# Altium PCB LedBlinker.PcbDoc
Units mil, origin at the board's own origin, x right, y up, seen from the top; angles counter-clockwise.
Board outline 1851.5 x 1851.5 mil, 2 copper layers (Top Layer, Bottom Layer), stack 64.8 mil thick; 36 components, 35 nets, 124 pads, 30 vias.
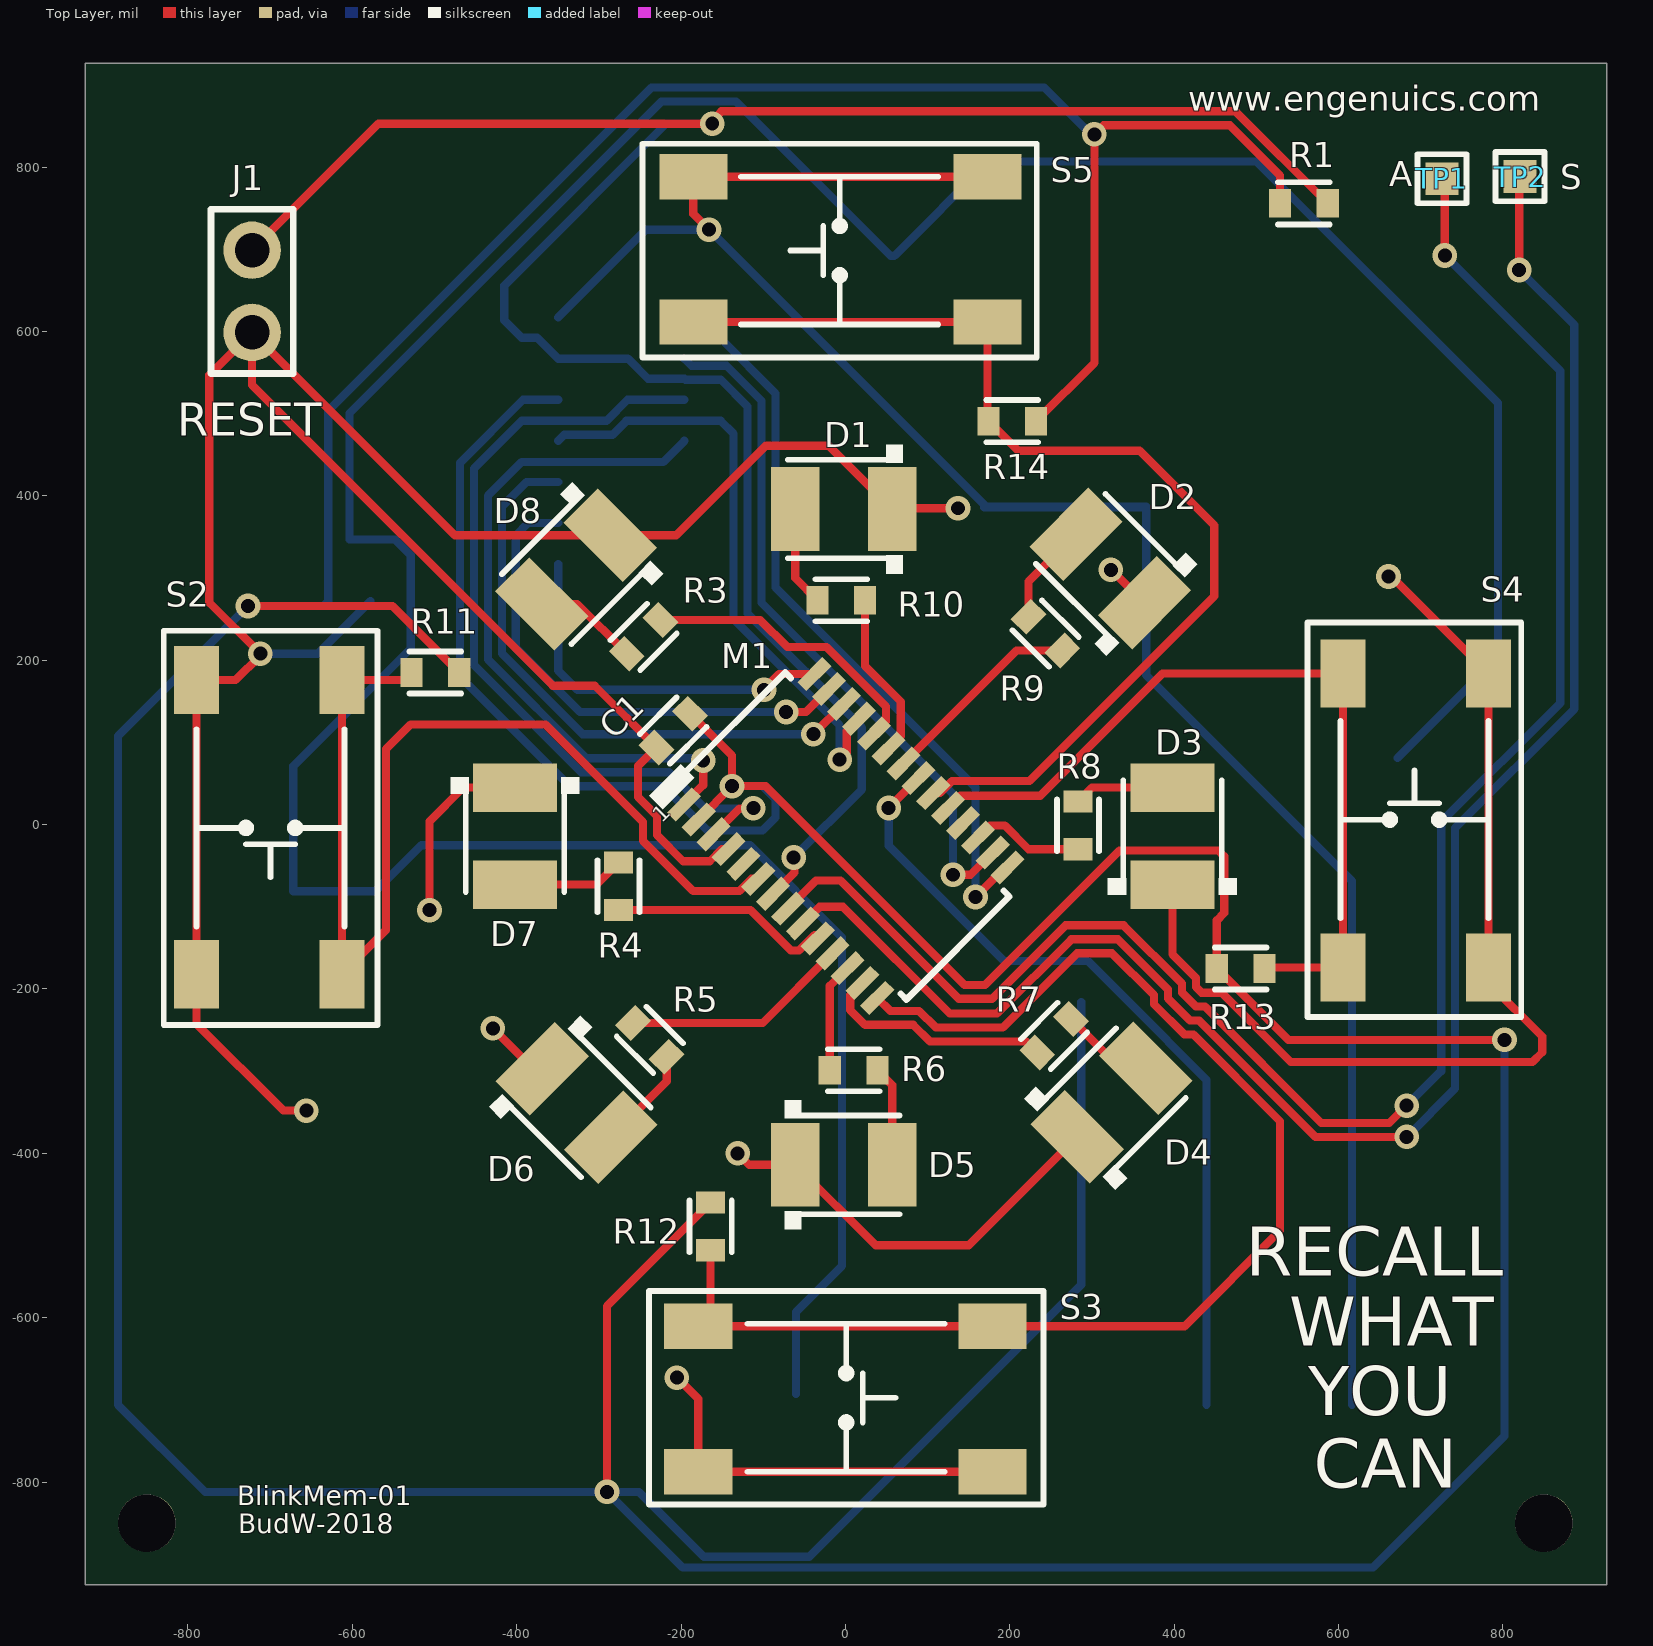
[diagram p0: Top Layer view]
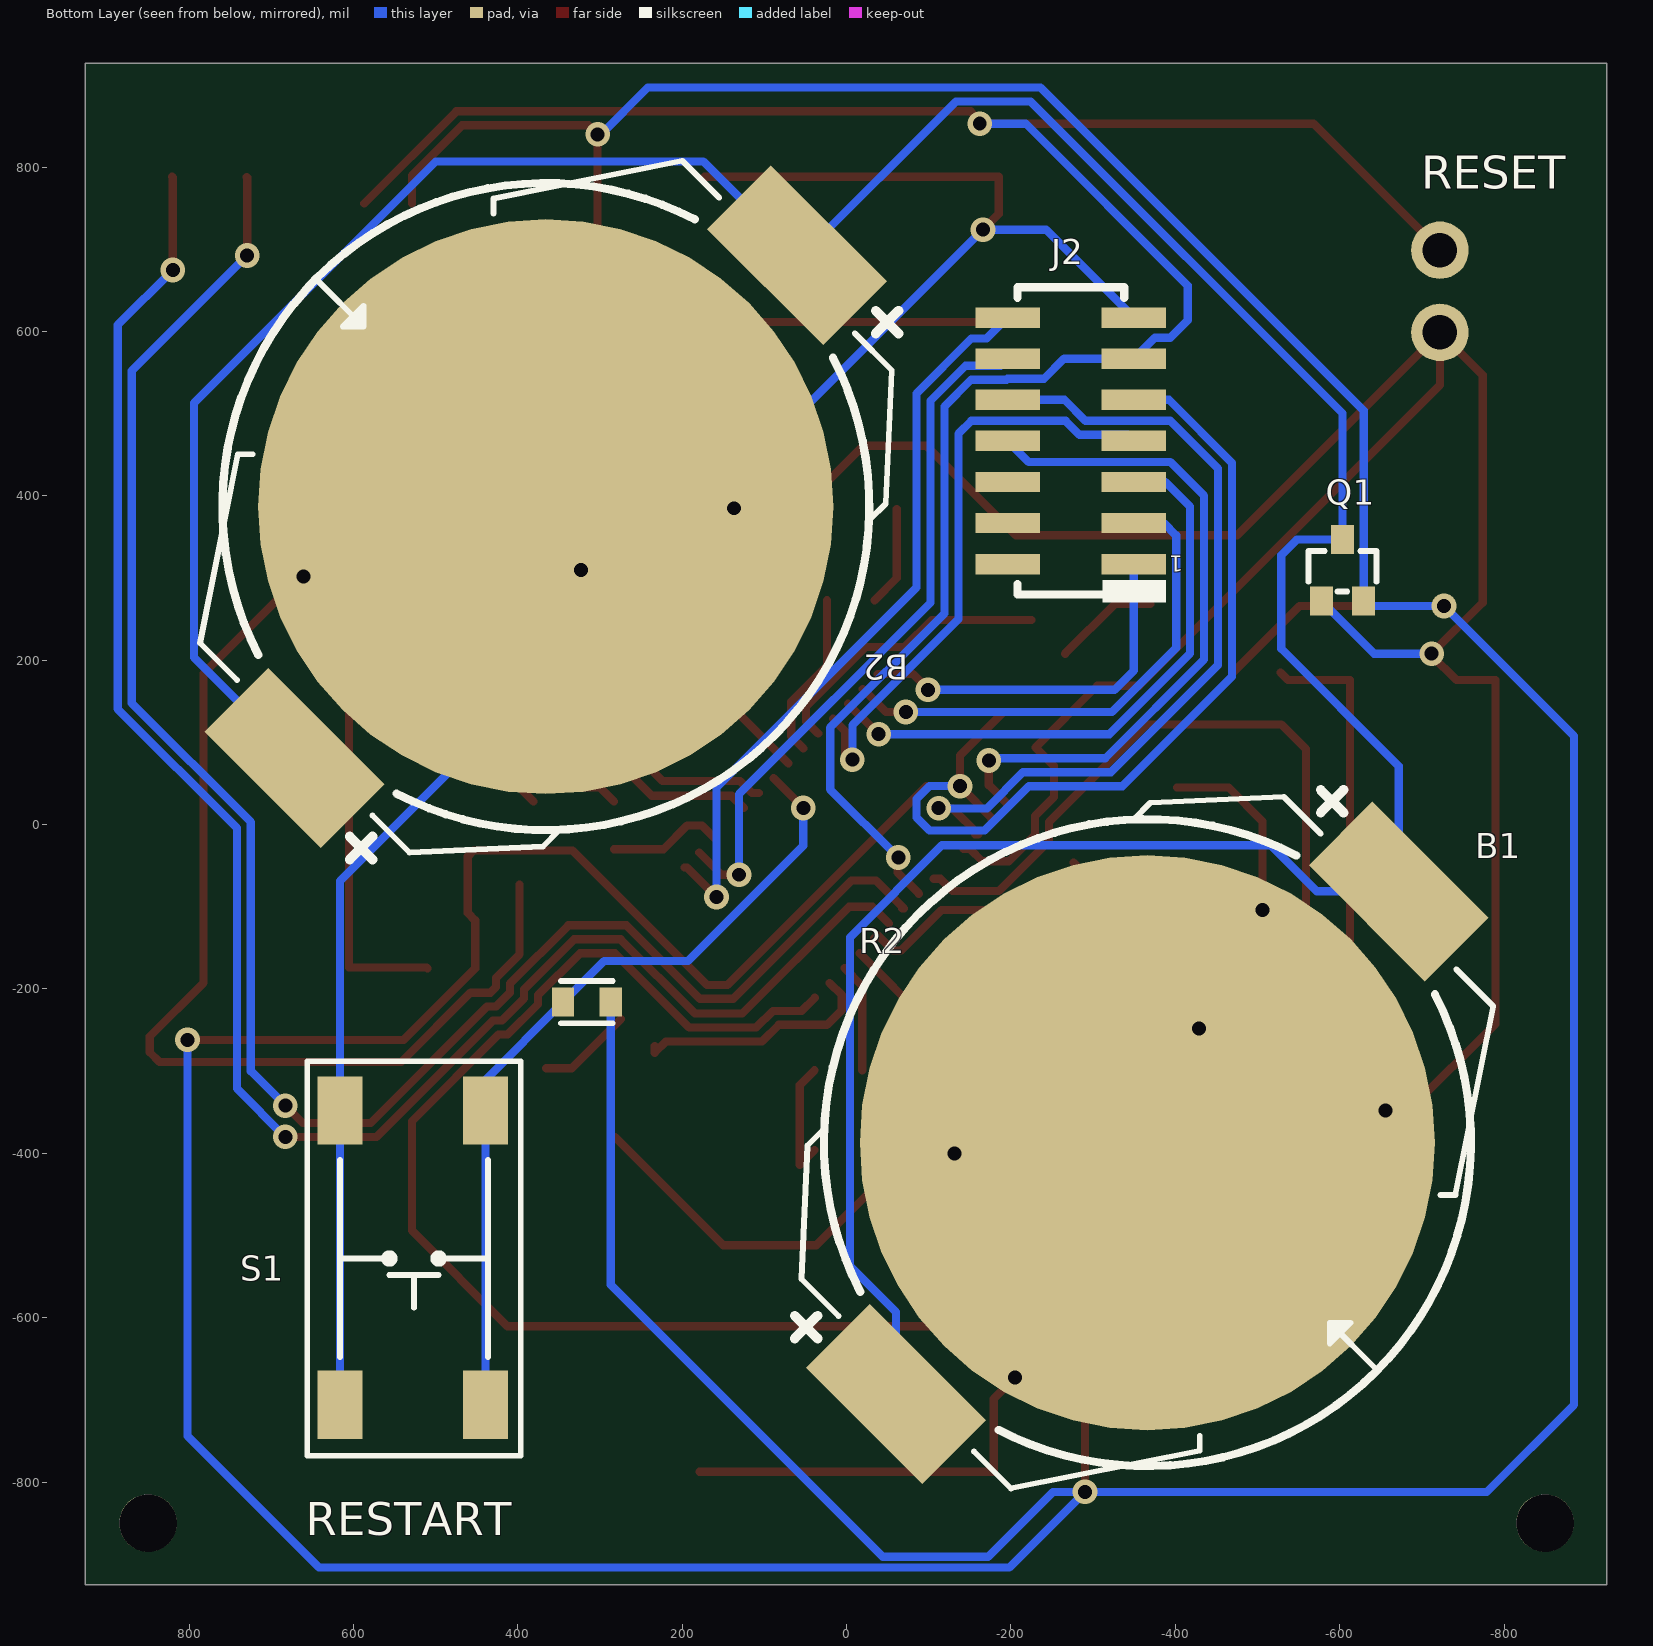
[diagram p1: Bottom Layer view, seen from below]

## Layer stack, top to bottom
Top Solder: solder mask 0.4, Solder Resist, Dk 3.5
Top Layer: signal copper 1.4
Dielectric1: core 62, FR-4, Dk 4.8
Bottom Layer: signal copper 1.4
Bottom Solder: solder mask 0.4, Solder Resist, Dk 3.5

## Board outline
-925,-925 -925,926.5 926.5,926.5 926.5,-925

## Design rules (kind name [scope] priority, off if disabled: settings)
Clearance ClearancePolygon [All vs InPoly] p1: gap=20 ignorepadtopadclearanceinfootprint=FALSE except(0: Arc-Hole Track-Hole SMDPad-Hole THPad-Hole Via-Hole Fill-Hole Poly-Hole Region-Hole Text-Hole)
Clearance [All] p2: gap=7 ignorepadtopadclearanceinfootprint=FALSE except(0: Arc-Hole Track-Hole SMDPad-Hole THPad-Hole Via-Hole Fill-Hole Poly-Hole Region-Hole Text-Hole)
HoleSize [All] p1: absolutevalues=TRUE maxlimit=250 minlimit=17 maxpercent=80.000 minpercent=20.000
MinimumSolderMaskSliver [All] p1 off: minsoldermaskwidth=10
PolygonConnect PolygonConnectVia [All vs IsVia] p1: connectstyle=Direct reliefconductorwidth=10 reliefentries=4 polygonreliefangle="90 Angle" airgapwidth=10
PolygonConnect [All] p2: connectstyle=Relief reliefconductorwidth=10 reliefentries=4 polygonreliefangle="90 Angle" airgapwidth=10
RoutingVias [All] p1: holewidth=17 width=26 viastyle="Through Hole" minholewidth=17 minwidth=26 maxholewidth=200 maxwidth=250
SilkToSilkClearance [All] p1 off: silktosilkclearance=10
SilkToSolderMaskClearance SilkscreenOverComponentPads [IsPad] p1 off: minsilkscreentomaskgap=7 clearancetoexposedcopper=TRUE
SolderMaskExpansion [All] p1: expansion=0
Width [All] p1: maxlimit=250 minlimit=7 preferedwidth=10
26 further rules are at their usual default settings.

## Components (designator, comment, footprint, x,y, rotation, side; value= is the part's Value field where it differs from the comment)
B1 "CR2032" "CONN BATTERY HOLDER CR2032" -366,-387 r135 bottom locked
B2 "CR2032" "CONN BATTERY HOLDER CR2032" 366,387 r315 bottom locked
C1 "1uF" 0603 -209.49,114.51 r225 top
D1 "CYN" "PLCC-2 AK" -2,384 r90 top locked
D2 "GRN" "PLCC-2 AK" 322.28,311.72 r45 top locked
D3 "YLW" "PLCC-2 AK" 398,-14 r0 top locked
D4 "ORG" "PLCC-2 AK" 323.72,-338.28 r315 top locked
D5 "RED" "PLCC-2 AK" -2,-414 r270 top locked
D6 "PNK" "PLCC-2 AK" -327.28,-338.72 r225 top locked
D7 "PRPL" "PLCC-2 AK" -402,-14 r180 top locked
D8 "BLU" "PLCC-2 AK" -327.72,310.28 r135 top locked
J1 "RESET PADS" HDR1X2 -722,649 r90 top
J2 "JTAG/SERIAL" "CONN 14POS 7X2 SMT FEMALE SMALL" -272.77,467 r0 bottom
M1 "MSP430F2122" TSSOP28 0.48,-13.8 r315 top locked
Q1 "DMG1013" SC-70-3 -603.41,309.4 r0 bottom
R1 "100k" 0603 558,756 r0 top
R2 "100k" 0603 316,-216 r180 bottom
R3 "390R" 0603 -245.51,228.49 r225 top
R4 "390R" 0603 -276,-75 r90 top
R5 "390R" 0603 -238,-262 r315 top
R6 "390R" 0603 10,-299 r0 top
R7 "390R" 0603 254,-257 r45 top
R8 "390R" 0603 283,-1 r90 top
R9 "390R" 0603 243.51,232.49 r135 top
R10 "390R" 0603 -5,273 r180 top
R11 "100k" 0603 -499,185 r0 top
R12 "100k" 0603 -164,-489 r90 top
R13 "100k" 0603 481,-175 r180 top
R14 "100k" 0603 203,491 r0 top
S1 "TL3301" "SWITCH TACT SMT TL3301" 528,-527 r270 bottom locked
S2 "TL3301" "SWITCH TACT SMT TL3301" -701,-3 r270 top locked
S3 "TL3301" "SWITCH TACT SMT TL3301" 0,-699 r0 top locked
S4 "TL3301" "SWITCH TACT SMT TL3301" 694,5 r90 top locked
S5 "TL3301" "SWITCH TACT SMT TL3301" -6,700 r180 top locked
TP1 "A" "TEST POINT SMT" 726,786 r0 top
TP2 "S" "TEST POINT SMT" 821,788.5 r90 top

## Footprints (in the part's own frame and the unit in brackets; to place one, negate y for a bottom-side part, rotate by r counter-clockwise, add the part's x,y. Pads: shape width x height; smd on the part's side, far side on the other; paste and mask are expansions set on the pad)
0603 [mil]
  rect 27x35 smd: 1(-29,0) 2(29,0)
  silkscreen extent -31,-26 31,26
"CONN 14POS 7X2 SMT FEMALE SMALL" [mm] "JTAG/SERIAL Connector Footprint"
  rect 2x0.63 smd: 1(-1.95,3.81) 2(1.95,3.81) 3(-1.95,2.54) 4(1.95,2.54) 5(-1.95,1.27) 6(1.95,1.27) 7(-1.95,0) 8(1.95,0) 9(-1.95,-1.27) 10(1.95,-1.27) 11(-1.95,-2.54) 12(1.95,-2.54) 13(-1.95,-3.81) 14(1.95,-3.81)
  silkscreen extent -2.95,-4.74 1.65,5
"CONN BATTERY HOLDER CR2032" [mm]
  rect 2.79x5.08 smd: +(-10.985,0) +(10.985,0)
  round 17.78 smd: -(0,0)
  silkscreen extent -11.99,-10 12,10
HDR1X2 [mil]
  round 70 hole 42: 1(-50,0) 2(50,0)
  silkscreen extent -100,-50 100,50
"PLCC-2 AK" [mil]
  rect 102x59 smd: A(0,59) K(0,-59)
  silkscreen extent -79,-72 79,68
SC-70-3 [mm]
  rect 0.7x0.9 smd paste+0 mask+0: 1(0.65,0.95) 2(-0.65,0.95) 3(0,-0.95)
  silkscreen extent -1.05,-0.6 1.05,0.65
"SWITCH TACT SMT TL3301" [mil]
  rect 83x55 smd: 1(-179,-88.5) 2(179,-88.5) 3(-179,88.5) 4(179,88.5)
  silkscreen extent -239,-129 241,132
"TEST POINT SMT" [mil]
  rect 40x40 smd paste-3937.01: 1(0,0)
  silkscreen extent -30,-30 30,30
TSSOP28 [mm]
  rect 0.4x1.1 smd: 1(-4.225,-2.85) 2(-3.575,-2.85) 3(-2.925,-2.85) 4(-2.275,-2.85) 5(-1.625,-2.85) 6(-0.975,-2.85) 7(-0.325,-2.85) 8(0.325,-2.85) 9(0.975,-2.85) 10(1.625,-2.85) 11(2.275,-2.85) 12(2.925,-2.85) 13(3.575,-2.85) 14(4.225,-2.85) 15(4.225,2.85) 16(3.575,2.85) 17(2.925,2.85) 18(2.275,2.85) 19(1.625,2.85) 20(0.975,2.85) 21(0.325,2.85) 22(-0.325,2.85) 23(-0.975,2.85) 24(-1.625,2.85) 25(-2.275,2.85) 26(-2.925,2.85) 27(-3.575,2.85) 28(-4.225,2.85) 28(-4.225,2.85)
  silkscreen extent -5.18,-3.43 4.9,2.25

## Part data
B1 B2: library part "CONN BATTERY HOLDER CR2032", "3V Coincell Battery", 2. Manufacturer=FCI, 3. Manufacturer Part Number=BK-912, 4. Digi-Key Part Number=BK-912-ND, 5. Internal Part Number=100192, 1. Description="CONN HOLDER COIN CELL 20MM SMD", 6. Last Modified=2012-09-03, 7. Modified By=JRL
C1: library part "CAPACITOR NON-POLARIZED", 1. Description="CAP [TYPE] [VALUE] [TOLERANCE] [VOLTAGE] [CLASS] [PACKAGE]"
D1: library part "LED AK", "CYAN", 1. Description="LED [COLOR] [STYLE] [PACKAGE] [MOUNT]"
D2: library part "LED AK", "GREEN", 1. Description="LED [COLOR] [STYLE] [PACKAGE] [MOUNT]"
D3: library part "LED AK", "YELLOW", 1. Description="LED [COLOR] [STYLE] [PACKAGE] [MOUNT]"
D4: library part "LED AK", "ORANGE", 1. Description="LED [COLOR] [STYLE] [PACKAGE] [MOUNT]"
D5: library part "LED AK", 1. Description="LED [COLOR] [STYLE] [PACKAGE] [MOUNT]"
D6: library part "LED AK", "PINK", 1. Description="LED [COLOR] [STYLE] [PACKAGE] [MOUNT]"
D7: library part "LED AK", "PURPLE", 1. Description="LED [COLOR] [STYLE] [PACKAGE] [MOUNT]"
D8: library part "LED AK", "BLUE", 1. Description="LED [COLOR] [STYLE] [PACKAGE] [MOUNT]"
J1: library part "CONN SIP 2"
J2: library part "CONN JTAG/SERIAL FEMALE", 2. Manufacturer=FCI, 3. Manufacturer Part Number=20021321-00014T4LF, 4. Digi-Key Part Number=609-3771-ND, 5. Internal Part Number=100254, 1. Description="CONN TERMINAL 14POS 7X12 1.27MM VERT SMD", 6. Last Modified=2018-10-07, 7. Modified By=BJW
M1: library part "MCU MSP430F2122 TSSOP28", 2. Manufacturer=TI, 3. Manufacturer Part Number=MSP430F2122TPWR, 4. Digi-Key Part Number=296-23365-ND, 1. Description="MCU MSP430F2122 TSSOP28 LED BLINKER", 6. Last Modified=2018-10-07, 7. Modified By=BJW
Q1: library part "TRANS PMOS 1G 2S 3D"
R1 R2 R3 R4 R5 R6 R7 R8 R9 R10 R11 R12 R13 R14: library part RESISTOR, 1. Description="RES [VALUE] [POWER] [TOLERANCE] [PACKAGE] [CONSTRUCTION]"
S1 S2 S3 S4 S5: library part "SWITCH SPST TL3301 JLEAD", "SPST TACT SWITCH", 2. Manufacturer=E-Switch, 3. Manufacturer Part Number=TL3301xxx, 1. Description="SWITCH TACT 260GF H=5.0MM SMT", 6. Last Modified=2014-10-24, 7. Modified By=JRL
TP1 TP2: library part "TEST POINT SMT", 2. Manufacturer=N/A, 1. Description="Test pad", 3. Manufacturer Part Number=N/A, 4. Digi-Key Part Number=N/A, 5. Internal Part Number=N/A, 6. Last Modified="June 12, 2008", 7. Modified By=JRL

## Free pads (board coordinates)
  round 70 hole 70 unplated paste-100 mask-100: ""(-850,-850) ""(850,-850)

## Via types
v1: diameter 30, hole 17, Top Layer to Bottom Layer, 30 vias

## Nets (pads, with @x,y where several pads share a name; then routed paths per layer and width w, separated by ;. In a path a pad name is that pad's centre, name@x,y a point inside that pad or via, vN(x,y) a via of type N, cw(c..) or ccw(c..) an arc to the next point about the centre after c; other vN are vias at no path point)
"BTN 1": M1.6 R11.1 S2.3 S2.4 | length 1311.4
  Top Layer w10: R11.1 -537,176 S2.3 S2.4 -559,-128.5 -559,92 -529,122 -365,122 -246.36,3.36 -246.36,-19.69 -185.26,-80.78 -128.87,-80.78 -114.08,-66 M1.6
"BTN 2": M1.14 R12.1 S3.3 S3.4 | length 1621.9
  Top Layer w10: R12.1 -164,-595.5 S3.3 S3.4 412.5,-610.5 529,-494 529,-361 423.5,-255.5 412.4,-255.5 375.5,-218.6 375.5,-207.5 324.56,-156.56 282,-156.56 191.56,-247 110,-247 89.64,-226.64 54.64,-226.64 M1.14
"BTN 3": M1.19 R13.1 S4.3 S4.4 | length 1002.2
  Top Layer w10: M1.19 139.85,35.08 237.08,35.08 386,184 S4.4 S4.3 511,-174 R13.1
"BTN 4": M1.20 R14.1 S5.3 S5.4 | length 1333.7
  Top Layer w10: S5.4 S5.3 173,492 R14.1 210,455 358,455 449,364 449,278.19 223.99,53.18 129.84,53.18 115.05,38.4 M1.20
GND: B1.- B2.- C1.2 D1.K D2.K D3.K D4.K D5.K D6.K D7.K D8.K J1.1 J2.13 M1.4 Q1.1 S1.1 S1.2 S2.1 S2.2 S3.1 S3.2 S4.1 S4.2 S5.1 S5.2 | length 8642
  Top Layer w10: v1(-656,-348) -684,-348 -789.5,-242.5 S2.2 S2.1 -742,176 -712,206 v1(-712,207.99) -774,269.99 -774,547 J1.1 ; v1(-506,-104) -506,4 -465,45 D7.K ; v1(-429,-248) -380,-297 D6.K ; v1(-205,-673) -179,-699 S3.1 S3.2 ; v1(-166,724) -185,743 S5.2 S5.1 ; M1.4 -150.28,-29.81 -165.06,-44.59 -197.41,-44.59 -229.36,-12.64 -229.36,10.4 -252.48,33.52 -252.48,71.52 C1.2 -305,169 -356,169 -722,535 J1.1 ; v1(-131,-400) -117,-414 D5.K 37,-512 150,-512 D4.K ; v1(137,385) 58,385 D1.K -20,461 -97,461 -206,352 D8.K -475,352 J1.1 ; v1(323,310) 324,310 D2.K ; D3.K 398,-157.88 426.5,-186.38 426.5,-197.47 433.53,-204.5 457.46,-204.5 541.96,-289 836,-289 848,-277 848,-258 782.5,-192.5 S4.1 S4.2 664.5,302 v1(661,302)
  Bottom Layer w10: v1(-712,207.99) -641.83,207.99 Q1.1 ; J2.13 -242.54,724 v1(-166,724) 171,387 B2.- 366,182 616.5,-68.5 S1.1 S1.2 ; B2.-@169,386 B2.-@365,386
LED1: M1.23 R10.1 | length 204.4
  Top Layer w10: R10.1 24,193 67.47,149.53 67.47,107.47 M1.23
LED2: M1.22 R9.1 | length 250.1
  Top Layer w10: M1.22 208.18,211.99 R9.1
LED3: M1.17 R8.1 | length 139.8
  Top Layer w10: M1.17 176.04,-1.11 194.06,-1.11 222.96,-30 R8.1
LED4: M1.13 R7.1 | length 296.1
  Top Layer w10: M1.13 5.88,-207.45 5.88,-225.48 24.05,-243.64 82.6,-243.64 102.96,-264 219.99,-264 R7.1 R7.1@233.49,-269.5
LED5: M1.12 R6.1 | length 133.4
  Top Layer w10: R6.1 -19,-196.14 M1.12
LED6: M1.11 R5.1 | length 278.2
  Top Layer w10: R5.1 -100.54,-241.49 M1.11
LED7: M1.10 R4.1 | length 272.2
  Top Layer w10: R4.1 -115.59,-104 -66.43,-153.16 -56.49,-153.16 -37.66,-134.34 M1.10
LED8: M1.24 R3.1 | length 357
  Top Layer w10: R3.1 -103.64,249 -70.67,216.04 -23.08,216.04 49.37,143.59 49.37,125.56 M1.24
NetD1_A: D1.A R10.2 | length 122.2
  Top Layer w10: D1.A -61,300 R10.2
NetD2_A: D2.A R9.2 | length 124.3
  Top Layer w10: R9.2 223,295.88 D2.A
NetD3_A: D3.A R8.2 | length 146.1
  Top Layer w10: R8.2 300,45 D3.A D3.A@381,28
NetD4_A: D4.A R7.2 | length 115.8
  Top Layer w10: R7.2 334.57,-296.56 D4.A
NetD5_A: D5.A R6.2 | length 147.9
  Top Layer w10: D5.A@39,-396 D5.A 57,-317 R6.2
NetD6_A: D6.A R5.2 | length 126.1
  Top Layer w10: D6.A -217.49,-312.37 R5.2
NetD7_A: D7.A R4.2 | length 137.2
  Top Layer w10: D7.A -303,-73 R4.2
NetD8_A: D8.A R3.2 | length 128.5
  Top Layer w10: D8.A -326.59,268.56 R3.2
NetM1_8: M1.8 TP1.1 | length 2246.3
  Top Layer w10: M1.8@-67.82,-102.19 M1.8 -35.62,-68 -6,-68 138,-212 178.48,-212 267.92,-122.56 338.64,-122.56 409.5,-193.42 409.5,-204.51 426.49,-221.5 437.58,-221.5 579.08,-363 661.82,-363 682.82,-342 v1(683,-342) ; v1(729.5,692.5) 729.5,787.5 TP1.1@730,788
  Bottom Layer w10: v1(683,-342) 725,-300 725,3 870,148 870,552 v1(729.5,692.5)
NetM1_9: M1.9 TP2.1 | length 2221.8
  Top Layer w10: M1.9 -31.43,-100 -3,-100 127,-230 184.52,-230 274.96,-139.56 331.6,-139.56 392.5,-200.46 392.5,-211.55 419.45,-238.5 430.54,-238.5 572.04,-380 v1(683,-380) ; v1(820,675) 820,787.5 TP2.1
  Bottom Layer w10: v1(683,-380) 683.18,-380 742,-321.18 742,-4.04 887,140.96 887,608 v1(820,675)
PIMO: J2.12 M1.16 | length 848
  Top Layer w10: v1(131,-61) 152.33,-61 M1.16
  Bottom Layer w10: J2.12 -187.4,558.4 -144.62,558.4 -102,515.78 -102,270 131,37 v1(131,-61)
POMI: J2.14 M1.15 | length 925.3
  Top Layer w10: v1@162.05,-81 158.33,-84.72 v1(158.33,-88) 194.25,-52.08 M1.15
  Bottom Layer w10: J2.14 -170.4,591.4 -151.66,591.4 -85,524.74 -85,288.67 158.33,45.35 v1(158.33,-88)
RST: J1.2 J2.11 M1.7 R1.2 | length 2840
  Top Layer w10: J1.2 -568,853 v1(-162,853) -162,857 -151,868 475,868 R1.2 ; M1.7 -62,-58.19 -62,-41 v1(-63,-40)
  Bottom Layer w10: v1(-162,853) -218,853 -415,656 -415,613.71 -393.88,592.6 -375.14,592.6 J2.11 -264.74,567 -240.34,542.6 -195.64,542.6 -194.44,541.4 -151.66,541.4 -119,508.74 -119,257 20,118 20,43 v1(-63,-40)
RST_BTN: M1.21 R2.1 S1.3 S1.4 | length 997.5
  Top Layer w10: v1(52.68,20.3) M1.21
  Bottom Layer w10: v1(52.68,20.3) 52.68,-25.68 193,-166 295,-166 R2.1 439.5,-310.5 S1.3 S1.4
TCK: J2.7 M1.25 | length 739.9
  Top Layer w10: v1(-7,79) 1.71,87.71 1.71,114.09 M1.25
  Bottom Layer w10: J2.7 -342.14,474.4 -283.56,474.4 -266.56,491.4 -151.66,491.4 -136,475.74 -136,249.96 -7,120.96 v1(-7,79)
TDI: J2.3 M1.27 | length 619.8
  Top Layer w10: v1(-72,137) -47.76,137 M1.27
  Bottom Layer w10: J2.3 -386,367 -401,352 -401,215.12 -322.88,137 v1(-72,137)
TDO: J2.1 M1.28 | length 459.4
  Top Layer w10: v1(-99,164) -99,165 -80.84,183.16 M1.28@-37.79,183.16
  Bottom Layer w10: J2.1 -349.54,187.71 -325.83,164 v1(-99,164)
TEST: J2.8 M1.1 | length 843.5
  Top Layer w10: M1.1 -173,47.95 v1(-173,78) v1@-174,79
  Bottom Layer w10: J2.8 -221.6,441.4 -393.88,441.4 -435,400.29 -435,201.04 -314.72,80.76 -175.76,80.76 v1(-173,78)
TICK: J2.10 M1.3 | length 1009.2
  Top Layer w10: M1.3@-156.11,-11.71 M1.3 -128.81,19.76 -112.24,19.76 v1(-112,20)
  Bottom Layer w10: J2.10 -265,517 -290.6,491.4 -393.88,491.4 -452,433.29 -452,194 -321.76,63.76 -214.76,63.76 -170.76,19.76 -112.24,19.76 v1(-112,20) v1@-111,21
TMS: J2.5 M1.26 | length 732.1
  Top Layer w10: v1(-39,110) -38.57,110 M1.26
  Bottom Layer w10: J2.5 -388,417 -418,387 -418,208.08 -319.92,110 v1(-39,110)
VBAT: B1.+ B2.+ Q1.3 | length 4303.8
  Bottom Layer w10: B1.+@-60.19,-692.81 -60.19,-593.14 -4,-536.95 -4,-137.18 -116.18,-25 -515.95,-25 -572.14,-81.19 -671.81,-81.19 -671.81,71.19 -529,214 -529,328 -547.8,346.8 Q1.3 -603.41,500.59 -224,880 -133,880 55.19,691.81 B2.+@59.19,691.81 ; B2.+@60.19,692.81 174.38,807 500,807 794,513 794,203.38 B2.+@671.81,81.19
VCC: C1.1 J2.9 M1.2 Q1.2 R1.1 R2.2 R11.2 R12.2 R13.2 R14.2 | length 9692.9
  Top Layer w10: v1(-727,266) -551,266 R11.2 ; v1(-290,-812) -290,-586 R12.2 ; C1.1 -138,84.02 v1(-138,46.76) ; M1.2@-176.39,6.38 M1.2 v1(-138,46.76) ; R14.2 303,562 v1(303,840) ; v1@308,835 v1(303,840) ; R1.1 529,789.96 467.96,851 314,851 v1(303,840) ; v1(802,-262) 539,-262 R13.2 452,-116.47 461,-107.47 461,-38.53 453.97,-31.5 333.5,-31.5 170,-195 145.04,-195 -96.96,47 -137.76,47 v1(-138,46.76)
  Bottom Layer w10: J2.9 -392.33,517 -469,440.33 -469,180 -335.76,46.76 -221.8,46.76 -168.04,-7 -100.82,-7 -85,8.82 -85,31.18 -100.82,47 -137.76,47 v1(-138,46.76) ; R2.2 287,-560 -44,-891 -172,-891 -251,-812 v1(-290,-812) ; v1(303,840) 299,840 242,897 -236,897 -629.19,503.81 -629.19,272.19 Q1.2 -635,266 v1(-727,266) -885,108 -885,-706 -779,-812 v1(-290,-812) ; v1(802,-262) 802,-744 642,-904 -198,-904 v1(-290,-812)
pads on no net: J2.2 J2.4 J2.6 M1.5 M1.18

## Silkscreen, mask and mechanical layers (free items; w line width, h text height)
Top Overlay:
  text "www.engenuics.com" at 417,869 h30
  text "RESET" at -813,473 h40
  text "RECALL" at 487,-549 h60
  text "WHAT" at 540,-634 h60
  text "YOU" at 563,-719 h60
  text "CAN" at 570,-807 h60
  text "BlinkMem-01" at -740,-836 h40
  text "BudW-2018" at -739,-870 h40
Bottom Overlay:
  text "RESET" at -699,774 h40
  text "RESTART" at 658,-865 h40
Mechanical 1:
  lines w7: -925,-925 -925,925 925,925 925,-925 -925,-925
Mechanical 5:
  region: 72,444 72,464 47,464 47,444
  region: 72,304 72,324 47,324 47,304
  region: 214.4,-334.46 228.54,-348.61 246.22,-330.93 232.08,-316.79
  region: 313.39,-433.46 327.54,-447.6 345.21,-429.92 331.07,-415.78
  region: -76,-474 -76,-494 -51,-494 -51,-474
  region: -76,-334 -76,-354 -51,-354 -51,-334
  region: -322.46,-229.4 -336.61,-243.54 -318.93,-261.22 -304.79,-247.08
  region: -421.46,-328.39 -435.6,-342.54 -417.92,-360.21 -403.78,-346.07
  rectangle: 318,-88 338,-63
  rectangle: 458,-88 478,-63
  region: -462,60 -482,60 -482,35 -462,35
  region: -322,60 -342,60 -342,35 -322,35
  region: -317.39,405.46 -331.54,419.6 -349.21,401.92 -335.07,387.78
  region: -218.4,306.46 -232.54,320.61 -250.22,302.93 -236.08,288.79
  region: 417.46,301.39 431.6,315.54 413.92,333.21 399.78,319.07
  region: 318.46,202.4 332.61,216.54 314.93,234.22 300.79,220.08
  region: -184,57 -200.26,73.26 -238.45,35.08 -222.18,18.82
  lines w5: -734,-24 -666,-24 ; -700,-68 -700,-24 ; -71,699 -27,699 ; -27,665 -27,733 ; 21,-731 21,-663 ; 21,-697 65,-697 ; 659,26 727,26 ; 693,26 693,70 ; -816,-121 -580,-121 -580,115 -816,115 -816,-121 ; -124,579 112,579 112,815 -124,815 -124,579 ; -118,-813 -118,-577 118,-577 118,-813 -118,-813 ; 573,-113 809,-113 809,123 573,123 573,-113
  lines w7: -197.98,55.42 -73.53,179.87 ; -72.98,179.42 -68.03,174.47 ; 63.65,-204.79 69.31,-210.45 193.76,-86 188.1,-80.34 ; -462,-100 -462,70 -342,70 -342,-85 -342,-100 -462,-100 ; -430.53,-321.32 -345.68,-236.47 -225.47,-356.68 -310.32,-441.53 -419.92,-331.93 -430.53,-321.32 ; -430.53,292.32 -310.32,412.53 -225.47,327.68 -335.07,218.08 -345.68,207.47 -430.53,292.32 ; -88,-474 -73,-474 82,-474 82,-354 -88,-354 -88,-474 ; -85,324 -70,324 85,324 85,444 -85,444 -85,324 ; 219.47,-357.68 339.68,-237.47 424.53,-322.32 314.93,-431.92 304.32,-442.53 219.47,-357.68 ; 219.47,329.68 304.32,414.53 424.53,294.32 339.68,209.47 230.08,319.07 219.47,329.68 ; 338,-100 338,70 458,70 458,-85 458,-100 338,-100
Mechanical 6:
  region: -310,265 -310,295 -390,295 -390,265
  lines w5: 493,-548 561,-548 ; 527,-592 527,-548 ; -388,269 -160,269 -160,643 -388,643 -388,269 ; 411,-645 411,-409 647,-409 647,-645 411,-645
  lines w7: -741.08,-175.92 -787.51,-222.35 -741.64,-451.69 -714.91,-451.69 ; -638.78,-659.11 -583.39,-603.72 ; -604.6,-603.72 -583.39,-624.93 -583.39,-617.86 -597.53,-603.72 ; -574.91,-9.75 -532.18,32.97 -370.17,25.93 -322.47,-21.77 ; -430.66,-739.48 -430.66,-763.52 -200.85,-809.49 -150.64,-759.28 ; -339,628 -339,642 ; -209,270 -209,284 ; -209,628 -209,642 ; -11.99,596.65 -54.6,554.04 -47.54,391.78 -2.8,347.04 ; 2.8,-347.04 47.54,-391.78 54.6,-554.04 11.99,-596.65 ; 150.64,759.28 200.85,809.49 430.66,763.52 430.66,739.48 ; 322.47,21.77 370.17,-25.93 532.18,-32.97 574.91,9.75 ; 597.53,603.72 583.39,617.86 583.39,624.93 604.6,603.72 ; 638.78,659.11 583.39,603.72 ; 714.91,451.69 741.64,451.69 787.51,222.35 741.08,175.92 ; -583.39,-603.72 -611.67,-603.72 -583.39,-632 -583.39,-603.72 ; 583.39,603.72 583.39,632 611.67,603.72 583.39,603.72

## Dimensions
-925,925 to 925,925 on Mechanical 5
925,925 to 925,-925 on Mechanical 5

## Text inside footprints (layer, text, board x,y; h text height)
J2: Bottom Overlay "1" at -409.58,327.24 h19.68 r180
M1: Top Overlay "1" at -223.67,1.05 h19.68 r45